# EAGLE board Q_RTC_Panel (EAGLE 7.7.0)
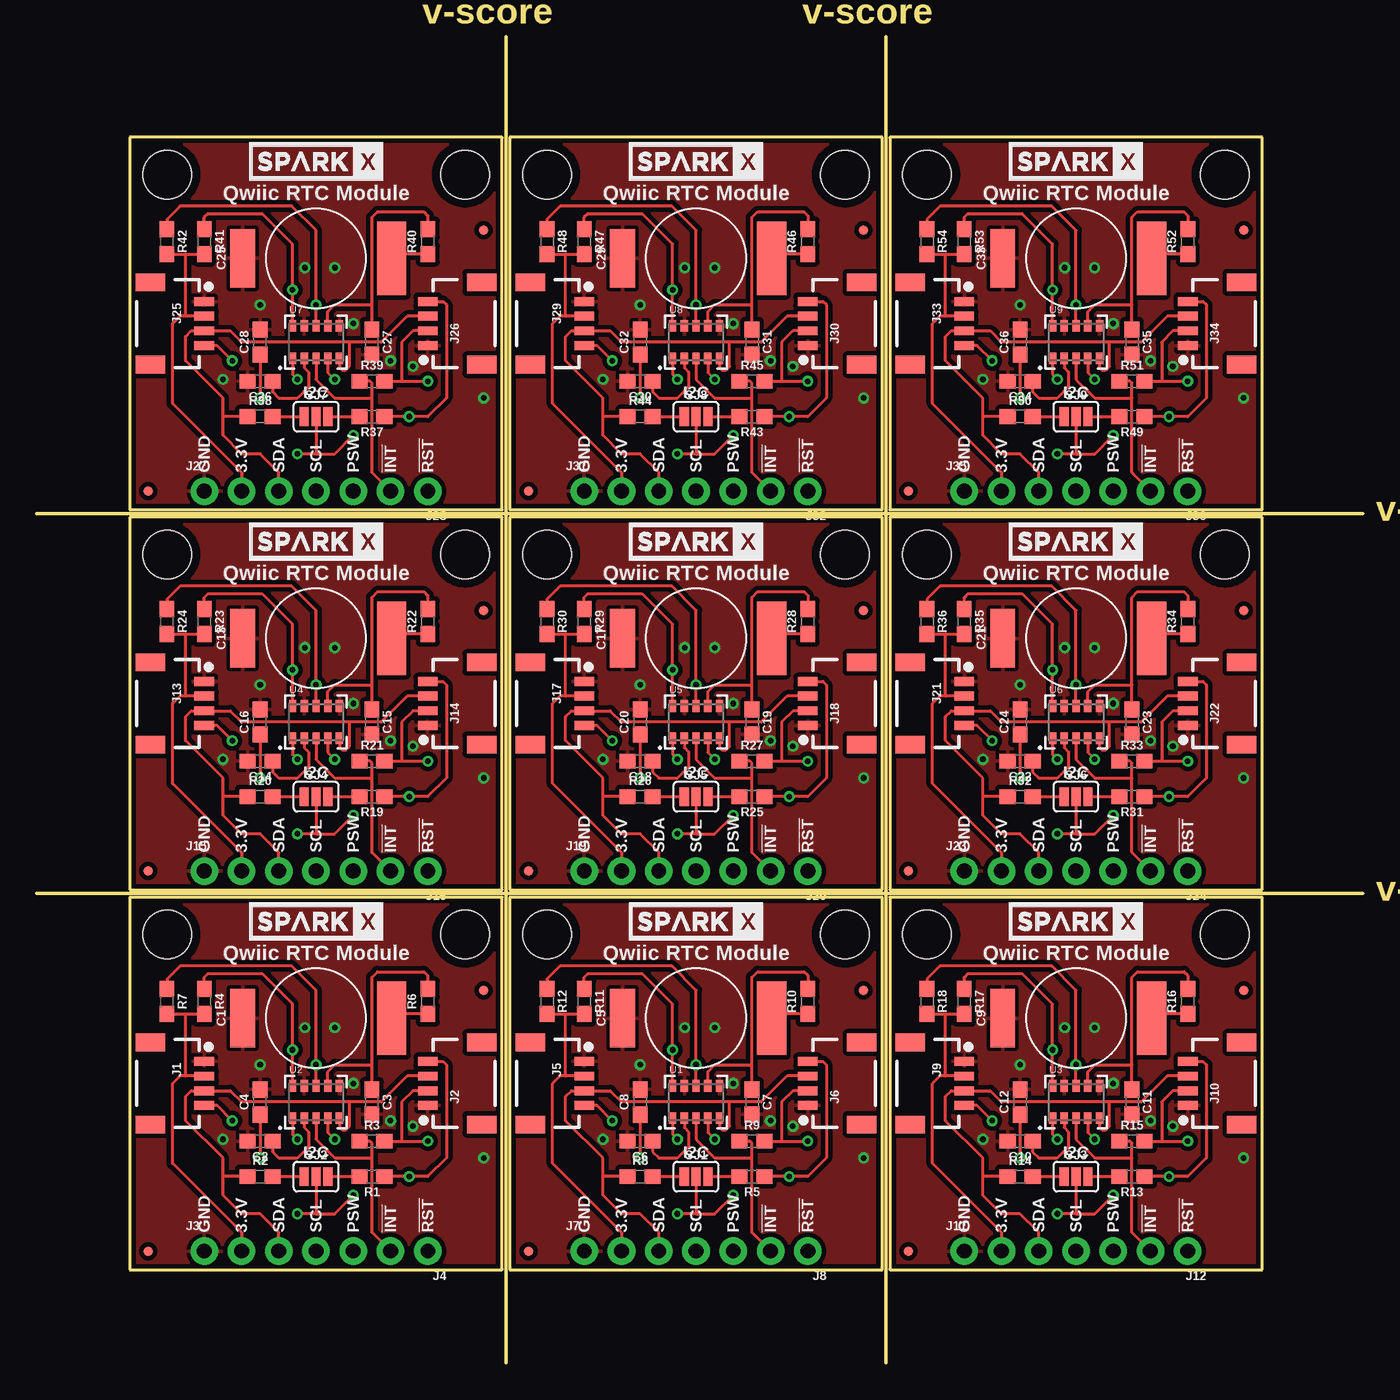
[diagram p0: board, top side]
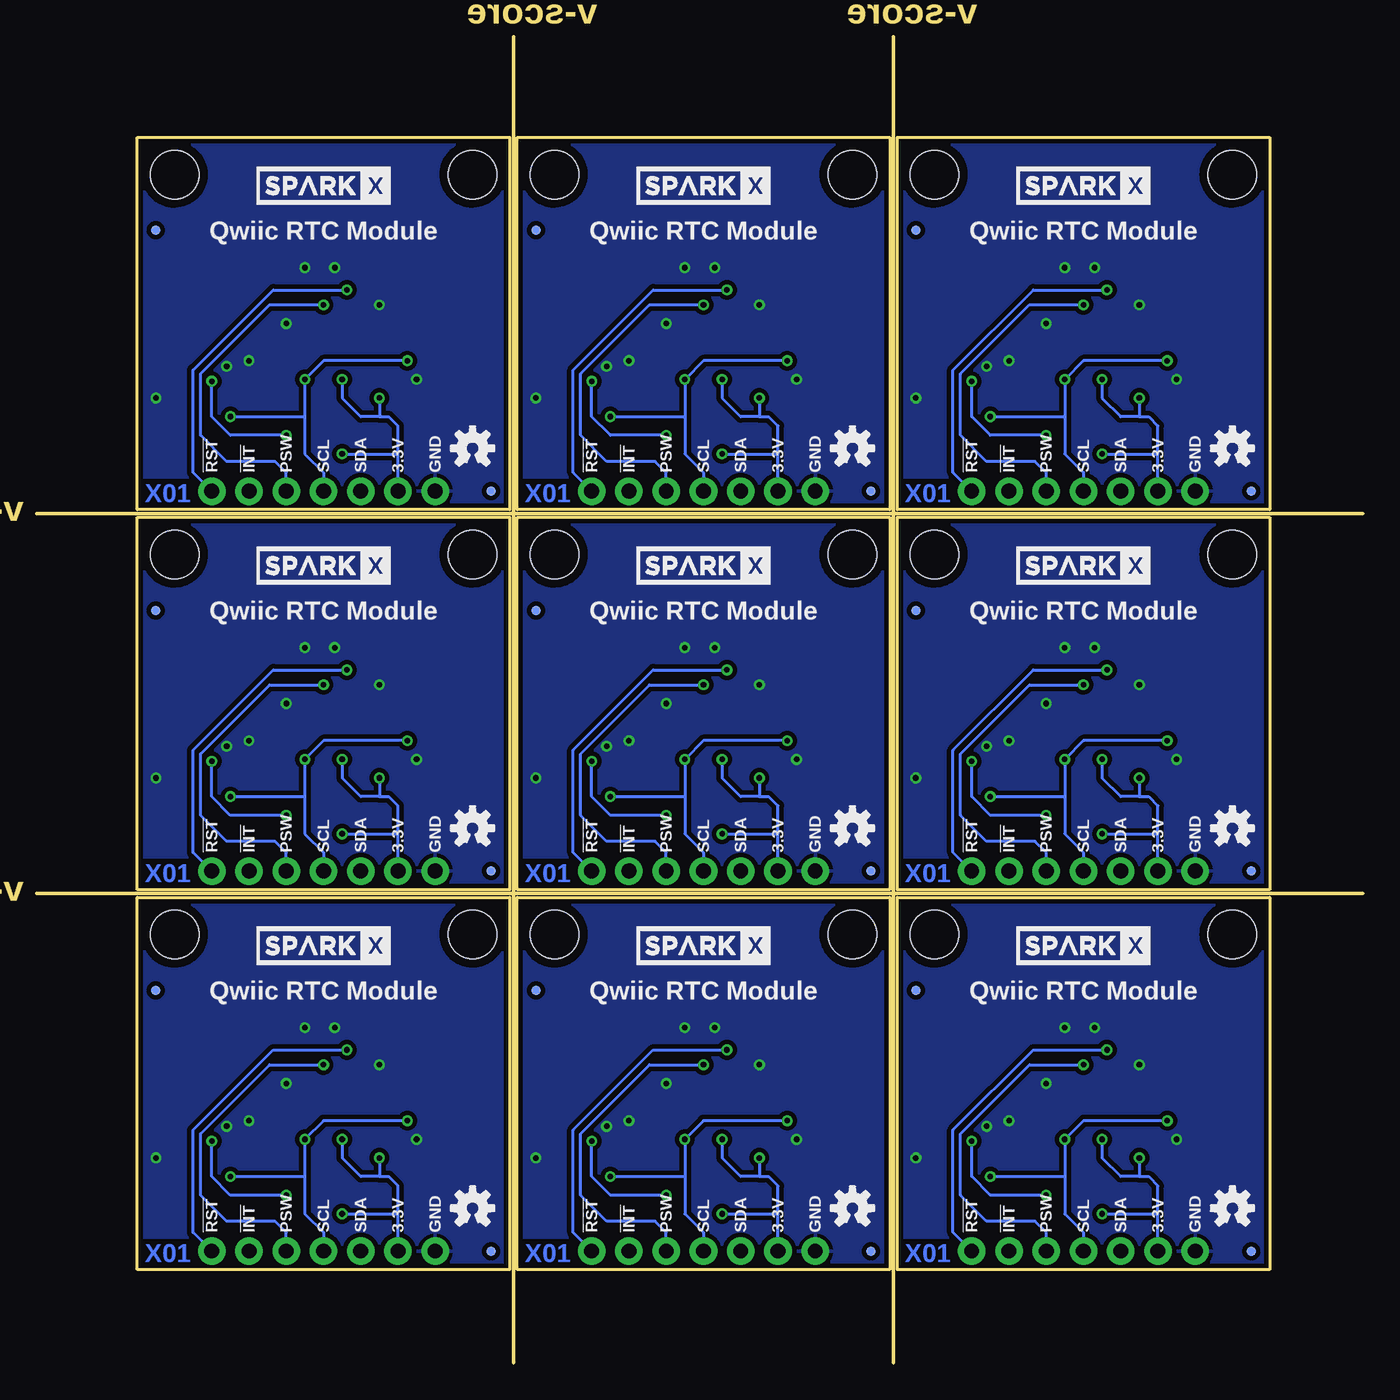
[diagram p1: board, bottom side, seen from below]

Size 90.42 x 90.42 mm. Coordinates in mm from the lower left corner, seen from the top.
Outline: 32,0 32,90.42
Outline: 57.91,0 57.91,90.42
Outline: 0,32 90.42,32
Outline: 0,57.91 90.42,57.91
Outline: 31.75,31.75 6.35,31.75 6.35,6.35 31.75,6.35 31.75,31.75
Outline: 57.66,31.75 32.26,31.75 32.26,6.35 57.66,6.35 57.66,31.75
Outline: 83.57,31.75 58.17,31.75 58.17,6.35 83.57,6.35 83.57,31.75
Outline: 31.75,57.66 6.35,57.66 6.35,32.26 31.75,32.26 31.75,57.66
Outline: 57.66,57.66 32.26,57.66 32.26,32.26 57.66,32.26 57.66,57.66
Outline: 83.57,57.66 58.17,57.66 58.17,32.26 83.57,32.26 83.57,57.66
Outline: 31.75,83.57 6.35,83.57 6.35,58.17 31.75,58.17 31.75,83.57
Outline: 57.66,83.57 32.26,83.57 32.26,58.17 57.66,58.17 57.66,83.57
Outline: 83.57,83.57 58.17,83.57 58.17,58.17 83.57,58.17 83.57,83.57
Copper layers (1*16): Top 0.035mm / dielectric 1.5mm / Bottom 0.035mm
Design rules "SparkFun-2-layer-PCBWay-LIMIT": minimum track width 6mil, minimum drill 0.3mm, track to track 6mil, track to pad 6mil, pad to pad 6mil, via to via 6mil, smd to smd 6mil, copper to edge 6mil, drill to drill 6mil, minimum pad ring 7mil, minimum via ring 7mil, stop-mask expansion 4mil, vias tented up to drill 25mil, thermal gap 10mil

## Footprints (pad centres in the part's own frame; a part is rotated, then mirrored left to right if it is on the bottom)
DSK-RADIAL-6.8MM = smd 5 x 2: + 0,5.15 | smd 4 x 1.7: - 0,-5
0603 = smd 1.1 x 1: 1 -0.85,0; 2 0.85,0
FIDUCIAL-MICRO = smd 0.635 x 0.635: 1 0,0
1X04_1MM_RA = smd 0.6 x 1.35: 1 -1.5,0; 2 -0.5,0; 3 0.5,0; 4 1.5,0 | smd 1.2 x 2: NC1 2.8,-3.675; NC2 -2.8,-3.675
1X04_NO_SILK = drill 1.016 pad 1.88: 1 0,0; 2 2.54,0; 3 5.08,0; 4 7.62,0
1X03_NO_SILK = drill 1.016 pad 1.88: 1 0,0; 2 2.54,0; 3 5.08,0
SMT-JUMPER_3_2-NC_PASTE_SILK = smd 0.635 x 1.27: 1 -0.813,0; 2 0,0; 3 0.813,0
RV-1805 = smd 0.5 x 0.8: 1 -1.6,-1.1; 2 -0.8,-1.1; 3 0,-1.1; 4 0.8,-1.1; 5 1.6,-1.1; 6 1.6,1.1; 7 0.8,1.1; 8 0,1.1; 9 -0.8,1.1; 10 -1.6,1.1 | smd 0 x 0: 11 0,0
STAND-OFF = hole 3.302: 0,0

## Placement (x,y rotation side)
C1  .22F-SUPERCAP  [DSK-RADIAL-6.8MM]  19.05,23.49 270 top
C2  47pF  [0603]  15.24,15.11 180 top
C3  10nF  [0603]  22.86,17.78 270 top
C4  10nF  [0603]  15.24,17.78 90 top
C5  .22F-SUPERCAP  [DSK-RADIAL-6.8MM]  44.96,23.49 270 top
C6  47pF  [0603]  41.15,15.11 180 top
C7  10nF  [0603]  48.77,17.78 270 top
C8  10nF  [0603]  41.15,17.78 90 top
C9  .22F-SUPERCAP  [DSK-RADIAL-6.8MM]  70.87,23.49 270 top
C10  47pF  [0603]  67.06,15.11 180 top
C11  10nF  [0603]  74.68,17.78 270 top
C12  10nF  [0603]  67.06,17.78 90 top
C13  .22F-SUPERCAP  [DSK-RADIAL-6.8MM]  19.05,49.4 270 top
C14  47pF  [0603]  15.24,41.02 180 top
C15  10nF  [0603]  22.86,43.69 270 top
C16  10nF  [0603]  15.24,43.69 90 top
C17  .22F-SUPERCAP  [DSK-RADIAL-6.8MM]  44.96,49.4 270 top
C18  47pF  [0603]  41.15,41.02 180 top
C19  10nF  [0603]  48.77,43.69 270 top
C20  10nF  [0603]  41.15,43.69 90 top
C21  .22F-SUPERCAP  [DSK-RADIAL-6.8MM]  70.87,49.4 270 top
C22  47pF  [0603]  67.06,41.02 180 top
C23  10nF  [0603]  74.68,43.69 270 top
C24  10nF  [0603]  67.06,43.69 90 top
C25  .22F-SUPERCAP  [DSK-RADIAL-6.8MM]  19.05,75.31 270 top
C26  47pF  [0603]  15.24,66.93 180 top
C27  10nF  [0603]  22.86,69.6 270 top
C28  10nF  [0603]  15.24,69.6 90 top
C29  .22F-SUPERCAP  [DSK-RADIAL-6.8MM]  44.96,75.31 270 top
C30  47pF  [0603]  41.15,66.93 180 top
C31  10nF  [0603]  48.77,69.6 270 top
C32  10nF  [0603]  41.15,69.6 90 top
C33  .22F-SUPERCAP  [DSK-RADIAL-6.8MM]  70.87,75.31 270 top
C34  47pF  [0603]  67.06,66.93 180 top
C35  10nF  [0603]  74.68,69.6 270 top
C36  10nF  [0603]  67.06,69.6 90 top
FD1  FIDUCIALUFIDUCIAL  [FIDUCIAL-MICRO]  30.48,25.4 0 bottom
FD2  FIDUCIALUFIDUCIAL  [FIDUCIAL-MICRO]  30.48,25.4 0 top
FD3  FIDUCIALUFIDUCIAL  [FIDUCIAL-MICRO]  7.62,7.62 0 bottom
FD4  FIDUCIALUFIDUCIAL  [FIDUCIAL-MICRO]  7.62,7.62 0 top
FD5  FIDUCIALUFIDUCIAL  [FIDUCIAL-MICRO]  56.39,25.4 0 bottom
FD6  FIDUCIALUFIDUCIAL  [FIDUCIAL-MICRO]  56.39,25.4 0 top
FD7  FIDUCIALUFIDUCIAL  [FIDUCIAL-MICRO]  33.53,7.62 0 bottom
FD8  FIDUCIALUFIDUCIAL  [FIDUCIAL-MICRO]  33.53,7.62 0 top
FD9  FIDUCIALUFIDUCIAL  [FIDUCIAL-MICRO]  82.3,25.4 0 bottom
FD10  FIDUCIALUFIDUCIAL  [FIDUCIAL-MICRO]  82.3,25.4 0 top
FD11  FIDUCIALUFIDUCIAL  [FIDUCIAL-MICRO]  59.44,7.62 0 bottom
FD12  FIDUCIALUFIDUCIAL  [FIDUCIAL-MICRO]  59.44,7.62 0 top
FD13  FIDUCIALUFIDUCIAL  [FIDUCIAL-MICRO]  30.48,51.31 0 bottom
FD14  FIDUCIALUFIDUCIAL  [FIDUCIAL-MICRO]  30.48,51.31 0 top
FD15  FIDUCIALUFIDUCIAL  [FIDUCIAL-MICRO]  7.62,33.53 0 bottom
FD16  FIDUCIALUFIDUCIAL  [FIDUCIAL-MICRO]  7.62,33.53 0 top
FD17  FIDUCIALUFIDUCIAL  [FIDUCIAL-MICRO]  56.39,51.31 0 bottom
FD18  FIDUCIALUFIDUCIAL  [FIDUCIAL-MICRO]  56.39,51.31 0 top
FD19  FIDUCIALUFIDUCIAL  [FIDUCIAL-MICRO]  33.53,33.53 0 bottom
FD20  FIDUCIALUFIDUCIAL  [FIDUCIAL-MICRO]  33.53,33.53 0 top
FD21  FIDUCIALUFIDUCIAL  [FIDUCIAL-MICRO]  82.3,51.31 0 bottom
FD22  FIDUCIALUFIDUCIAL  [FIDUCIAL-MICRO]  82.3,51.31 0 top
FD23  FIDUCIALUFIDUCIAL  [FIDUCIAL-MICRO]  59.44,33.53 0 bottom
FD24  FIDUCIALUFIDUCIAL  [FIDUCIAL-MICRO]  59.44,33.53 0 top
FD25  FIDUCIALUFIDUCIAL  [FIDUCIAL-MICRO]  30.48,77.22 0 bottom
FD26  FIDUCIALUFIDUCIAL  [FIDUCIAL-MICRO]  30.48,77.22 0 top
FD27  FIDUCIALUFIDUCIAL  [FIDUCIAL-MICRO]  7.62,59.44 0 bottom
FD28  FIDUCIALUFIDUCIAL  [FIDUCIAL-MICRO]  7.62,59.44 0 top
FD29  FIDUCIALUFIDUCIAL  [FIDUCIAL-MICRO]  56.39,77.22 0 bottom
FD30  FIDUCIALUFIDUCIAL  [FIDUCIAL-MICRO]  56.39,77.22 0 top
FD31  FIDUCIALUFIDUCIAL  [FIDUCIAL-MICRO]  33.53,59.44 0 bottom
FD32  FIDUCIALUFIDUCIAL  [FIDUCIAL-MICRO]  33.53,59.44 0 top
FD33  FIDUCIALUFIDUCIAL  [FIDUCIAL-MICRO]  82.3,77.22 0 bottom
FD34  FIDUCIALUFIDUCIAL  [FIDUCIAL-MICRO]  82.3,77.22 0 top
FD35  FIDUCIALUFIDUCIAL  [FIDUCIAL-MICRO]  59.44,59.44 0 bottom
FD36  FIDUCIALUFIDUCIAL  [FIDUCIAL-MICRO]  59.44,59.44 0 top
J1  SMD  [1X04_1MM_RA]  11.43,19.05 270 top
J2  SMD  [1X04_1MM_RA]  26.67,19.05 90 top
J3  PTH  [1X04_NO_SILK]  11.43,7.62 0 top
J4  [1X03_NO_SILK]  26.67,7.62 180 top
J5  SMD  [1X04_1MM_RA]  37.34,19.05 270 top
J6  SMD  [1X04_1MM_RA]  52.58,19.05 90 top
J7  PTH  [1X04_NO_SILK]  37.34,7.62 0 top
J8  [1X03_NO_SILK]  52.58,7.62 180 top
J9  SMD  [1X04_1MM_RA]  63.25,19.05 270 top
J10  SMD  [1X04_1MM_RA]  78.49,19.05 90 top
J11  PTH  [1X04_NO_SILK]  63.25,7.62 0 top
J12  [1X03_NO_SILK]  78.49,7.62 180 top
J13  SMD  [1X04_1MM_RA]  11.43,44.96 270 top
J14  SMD  [1X04_1MM_RA]  26.67,44.96 90 top
J15  PTH  [1X04_NO_SILK]  11.43,33.53 0 top
J16  [1X03_NO_SILK]  26.67,33.53 180 top
J17  SMD  [1X04_1MM_RA]  37.34,44.96 270 top
J18  SMD  [1X04_1MM_RA]  52.58,44.96 90 top
J19  PTH  [1X04_NO_SILK]  37.34,33.53 0 top
J20  [1X03_NO_SILK]  52.58,33.53 180 top
J21  SMD  [1X04_1MM_RA]  63.25,44.96 270 top
J22  SMD  [1X04_1MM_RA]  78.49,44.96 90 top
J23  PTH  [1X04_NO_SILK]  63.25,33.53 0 top
J24  [1X03_NO_SILK]  78.49,33.53 180 top
J25  SMD  [1X04_1MM_RA]  11.43,70.87 270 top
J26  SMD  [1X04_1MM_RA]  26.67,70.87 90 top
J27  PTH  [1X04_NO_SILK]  11.43,59.44 0 top
J28  [1X03_NO_SILK]  26.67,59.44 180 top
J29  SMD  [1X04_1MM_RA]  37.34,70.87 270 top
J30  SMD  [1X04_1MM_RA]  52.58,70.87 90 top
J31  PTH  [1X04_NO_SILK]  37.34,59.44 0 top
J32  [1X03_NO_SILK]  52.58,59.44 180 top
J33  SMD  [1X04_1MM_RA]  63.25,70.87 270 top
J34  SMD  [1X04_1MM_RA]  78.49,70.87 90 top
J35  PTH  [1X04_NO_SILK]  63.25,59.44 0 top
J36  [1X03_NO_SILK]  78.49,59.44 180 top
LOGO1  OSHW-LOGOS  [OSHW-LOGO-S]  8.89,10.54 0 bottom
LOGO2  OSHW-LOGOS  [OSHW-LOGO-S]  34.8,10.54 0 bottom
LOGO3  OSHW-LOGOS  [OSHW-LOGO-S]  60.71,10.54 0 bottom
LOGO4  OSHW-LOGOS  [OSHW-LOGO-S]  8.89,36.45 0 bottom
LOGO5  OSHW-LOGOS  [OSHW-LOGO-S]  34.8,36.45 0 bottom
LOGO6  OSHW-LOGOS  [OSHW-LOGO-S]  60.71,36.45 0 bottom
LOGO7  OSHW-LOGOS  [OSHW-LOGO-S]  8.89,62.36 0 bottom
LOGO8  OSHW-LOGOS  [OSHW-LOGO-S]  34.8,62.36 0 bottom
LOGO9  OSHW-LOGOS  [OSHW-LOGO-S]  60.71,62.36 0 bottom
R1  2.2k  [0603]  22.86,12.7 180 top
R2  2.2k  [0603]  15.24,12.7 0 top
R3  10k  [0603]  22.86,15.11 0 top
R4  10k  [0603]  11.43,24.64 270 top
R5  2.2k  [0603]  48.77,12.7 180 top
R6  1K  [0603]  26.67,24.64 90 top
R7  10k  [0603]  8.89,24.64 270 top
R8  2.2k  [0603]  41.15,12.7 0 top
R9  10k  [0603]  48.77,15.11 0 top
R10  1K  [0603]  52.58,24.64 90 top
R11  10k  [0603]  37.34,24.64 270 top
R12  10k  [0603]  34.8,24.64 270 top
R13  2.2k  [0603]  74.68,12.7 180 top
R14  2.2k  [0603]  67.06,12.7 0 top
R15  10k  [0603]  74.68,15.11 0 top
R16  1K  [0603]  78.49,24.64 90 top
R17  10k  [0603]  63.25,24.64 270 top
R18  10k  [0603]  60.71,24.64 270 top
R19  2.2k  [0603]  22.86,38.61 180 top
R20  2.2k  [0603]  15.24,38.61 0 top
R21  10k  [0603]  22.86,41.02 0 top
R22  1K  [0603]  26.67,50.55 90 top
R23  10k  [0603]  11.43,50.55 270 top
R24  10k  [0603]  8.89,50.55 270 top
R25  2.2k  [0603]  48.77,38.61 180 top
R26  2.2k  [0603]  41.15,38.61 0 top
R27  10k  [0603]  48.77,41.02 0 top
R28  1K  [0603]  52.58,50.55 90 top
R29  10k  [0603]  37.34,50.55 270 top
R30  10k  [0603]  34.8,50.55 270 top
R31  2.2k  [0603]  74.68,38.61 180 top
R32  2.2k  [0603]  67.06,38.61 0 top
R33  10k  [0603]  74.68,41.02 0 top
R34  1K  [0603]  78.49,50.55 90 top
R35  10k  [0603]  63.25,50.55 270 top
R36  10k  [0603]  60.71,50.55 270 top
R37  2.2k  [0603]  22.86,64.52 180 top
R38  2.2k  [0603]  15.24,64.52 0 top
R39  10k  [0603]  22.86,66.93 0 top
R40  1K  [0603]  26.67,76.45 90 top
R41  10k  [0603]  11.43,76.45 270 top
R42  10k  [0603]  8.89,76.45 270 top
R43  2.2k  [0603]  48.77,64.52 180 top
R44  2.2k  [0603]  41.15,64.52 0 top
R45  10k  [0603]  48.77,66.93 0 top
R46  1K  [0603]  52.58,76.45 90 top
R47  10k  [0603]  37.34,76.45 270 top
R48  10k  [0603]  34.8,76.45 270 top
R49  2.2k  [0603]  74.68,64.52 180 top
R50  2.2k  [0603]  67.06,64.52 0 top
R51  10k  [0603]  74.68,66.93 0 top
R52  1K  [0603]  78.49,76.45 90 top
R53  10k  [0603]  63.25,76.45 270 top
R54  10k  [0603]  60.71,76.45 270 top
SJ1  JUMPER-SMT_3_2-NC_PASTE_SILK  [SMT-JUMPER_3_2-NC_PASTE_SILK]  44.96,12.7 0 top
SJ2  JUMPER-SMT_3_2-NC_PASTE_SILK  [SMT-JUMPER_3_2-NC_PASTE_SILK]  19.05,12.7 0 top
SJ3  JUMPER-SMT_3_2-NC_PASTE_SILK  [SMT-JUMPER_3_2-NC_PASTE_SILK]  70.87,12.7 0 top
SJ4  JUMPER-SMT_3_2-NC_PASTE_SILK  [SMT-JUMPER_3_2-NC_PASTE_SILK]  19.05,38.61 0 top
SJ5  JUMPER-SMT_3_2-NC_PASTE_SILK  [SMT-JUMPER_3_2-NC_PASTE_SILK]  44.96,38.61 0 top
SJ6  JUMPER-SMT_3_2-NC_PASTE_SILK  [SMT-JUMPER_3_2-NC_PASTE_SILK]  70.87,38.61 0 top
SJ7  JUMPER-SMT_3_2-NC_PASTE_SILK  [SMT-JUMPER_3_2-NC_PASTE_SILK]  19.05,64.52 0 top
SJ8  JUMPER-SMT_3_2-NC_PASTE_SILK  [SMT-JUMPER_3_2-NC_PASTE_SILK]  44.96,64.52 0 top
SJ9  JUMPER-SMT_3_2-NC_PASTE_SILK  [SMT-JUMPER_3_2-NC_PASTE_SILK]  70.87,64.52 0 top
U1  RV-1805  [RV-1805]  44.96,17.78 0 top
U2  RV-1805  [RV-1805]  19.05,17.78 0 top
U3  RV-1805  [RV-1805]  70.87,17.78 0 top
U4  RV-1805  [RV-1805]  19.05,43.69 0 top
U5  RV-1805  [RV-1805]  44.96,43.69 0 top
U6  RV-1805  [RV-1805]  70.87,43.69 0 top
U7  RV-1805  [RV-1805]  19.05,69.6 0 top
U8  RV-1805  [RV-1805]  44.96,69.6 0 top
U9  RV-1805  [RV-1805]  70.87,69.6 0 top
U$1  STAND-OFF  [STAND-OFF]  55.12,29.21 180 top
U$2  STAND-OFF  [STAND-OFF]  34.8,29.21 180 top
U$3  SPARKX-LOGO4  [SPARKX-MEDIUM]  19.05,28.45 0 bottom
U$4  SPARKX-LOGO4  [SPARKX-MEDIUM]  44.96,28.45 0 bottom
U$5  SPARKX-LOGO4  [SPARKX-MEDIUM]  19.05,30.1 0 top
U$6  STAND-OFF  [STAND-OFF]  29.21,29.21 180 top
U$7  STAND-OFF  [STAND-OFF]  8.89,29.21 180 top
U$8  SPARKX-LOGO4  [SPARKX-MEDIUM]  44.96,30.1 0 top
U$9  STAND-OFF  [STAND-OFF]  81.03,29.21 180 top
U$10  STAND-OFF  [STAND-OFF]  60.71,29.21 180 top
U$11  SPARKX-LOGO4  [SPARKX-MEDIUM]  70.87,28.45 0 bottom
U$12  SPARKX-LOGO4  [SPARKX-MEDIUM]  70.87,30.1 0 top
U$13  STAND-OFF  [STAND-OFF]  29.21,55.12 180 top
U$14  STAND-OFF  [STAND-OFF]  8.89,55.12 180 top
U$15  SPARKX-LOGO4  [SPARKX-MEDIUM]  19.05,54.36 0 bottom
U$16  SPARKX-LOGO4  [SPARKX-MEDIUM]  19.05,56.01 0 top
U$17  STAND-OFF  [STAND-OFF]  55.12,55.12 180 top
U$18  STAND-OFF  [STAND-OFF]  34.8,55.12 180 top
U$19  SPARKX-LOGO4  [SPARKX-MEDIUM]  44.96,54.36 0 bottom
U$20  SPARKX-LOGO4  [SPARKX-MEDIUM]  44.96,56.01 0 top
U$21  STAND-OFF  [STAND-OFF]  81.03,55.12 180 top
U$22  STAND-OFF  [STAND-OFF]  60.71,55.12 180 top
U$23  SPARKX-LOGO4  [SPARKX-MEDIUM]  70.87,54.36 0 bottom
U$24  SPARKX-LOGO4  [SPARKX-MEDIUM]  70.87,56.01 0 top
U$25  STAND-OFF  [STAND-OFF]  29.21,81.03 180 top
U$26  STAND-OFF  [STAND-OFF]  8.89,81.03 180 top
U$27  SPARKX-LOGO4  [SPARKX-MEDIUM]  19.05,80.26 0 bottom
U$28  SPARKX-LOGO4  [SPARKX-MEDIUM]  19.05,81.91 0 top
U$29  STAND-OFF  [STAND-OFF]  55.12,81.03 180 top
U$30  STAND-OFF  [STAND-OFF]  34.8,81.03 180 top
U$31  SPARKX-LOGO4  [SPARKX-MEDIUM]  44.96,80.26 0 bottom
U$32  SPARKX-LOGO4  [SPARKX-MEDIUM]  44.96,81.91 0 top
U$33  STAND-OFF  [STAND-OFF]  81.03,81.03 180 top
U$34  STAND-OFF  [STAND-OFF]  60.71,81.03 180 top
U$35  SPARKX-LOGO4  [SPARKX-MEDIUM]  70.87,80.26 0 bottom
U$36  SPARKX-LOGO4  [SPARKX-MEDIUM]  70.87,81.91 0 top

## Library data of the parts
C1 C5 C9 C13 C17 C21 C25 C29 C33 = SparkFun-Capacitors; PROD_ID: CAP-13907
C2 C6 C10 C14 C18 C22 C26 C30 C34 = SparkFun-Capacitors; PROD_ID: CAP-08913
C3 C4 C7 C8 C11 C12 C15 C16 C19 C20 C23 C24 C27 C28 C31 C32 C35 C36 = SparkFun-Capacitors; PROD_ID: CAP-00867
FD1-FD36 LOGO1-LOGO9 = SparkFun-Aesthetics
J1 J2 J5 J6 J9 J10 J13 J14 J17 J18 J21 J22 J25 J26 J29 J30 J33 J34 = SparkFun-Connectors; PROD_ID: CONN-13694
J3 J7 J11 J15 J19 J23 J27 J31 J35 = SparkFun-Connectors; PROD_ID: CONN-09696
J4 J8 J12 J16 J20 J24 J28 J32 J36 = SparkFun-Connectors
R1 R2 R5 R8 R13 R14 R19 R20 R25 R26 R31 R32 R37 R38 R43 R44 R49 R50 = SparkFun-Resistors; PROD_ID: RES-08272
R3 R4 R7 R9 R11 R12 R15 R17 R18 R21 R23 R24 R27 R29 R30 R33 R35 R36 R39 R41 R42 R45 R47 R48 R51 R53 R54 = SparkFun-Resistors; PROD_ID: RES-00824
R6 R10 R16 R22 R28 R34 R40 R46 R52 = SparkFun-Resistors; PROD_ID: RES-11227
SJ1-SJ9 = SparkFun-Jumpers
U1-U9 = SparkFun-Clocks
U$1 U$2 U$6 U$7 U$9 U$10 U$13 U$14 U$17 U$18 U$21 U$22 U$25 U$26 U$29 U$30 U$33 U$34 = SparkFun
U$3-U$5 U$8 U$11 U$12 U$15 U$16 U$19 U$20 U$23 U$24 U$27 U$28 U$31 U$32 U$35 U$36 = SparkX

## Nets
3.3V: C4.1 J1.2 J2.2 J3.2 R3.2 R4.2 R7.2 SJ2.2 U2.1
3.3V1: C8.1 J5.2 J6.2 J7.2 R9.2 R11.2 R12.2 SJ1.2 U1.1
3.3V2: C12.1 J9.2 J10.2 J11.2 R15.2 R17.2 R18.2 SJ3.2 U3.1
3.3V3: C16.1 J13.2 J14.2 J15.2 R21.2 R23.2 R24.2 SJ4.2 U4.1
3.3V4: C20.1 J17.2 J18.2 J19.2 R27.2 R29.2 R30.2 SJ5.2 U5.1
3.3V5: C24.1 J21.2 J22.2 J23.2 R33.2 R35.2 R36.2 SJ6.2 U6.1
3.3V6: C28.1 J25.2 J26.2 J27.2 R39.2 R41.2 R42.2 SJ7.2 U7.1
3.3V7: C32.1 J29.2 J30.2 J31.2 R45.2 R47.2 R48.2 SJ8.2 U8.1
3.3V8: C36.1 J33.2 J34.2 J35.2 R51.2 R53.2 R54.2 SJ9.2 U9.1
!INT: J4.2 R3.1 U2.3
!INT1: J8.2 R9.1 U1.3
!INT2: J12.2 R15.1 U3.3
!INT3: J16.2 R21.1 U4.3
!INT4: J20.2 R27.1 U5.3
!INT5: J24.2 R33.1 U6.3
!INT6: J28.2 R39.1 U7.3
!INT7: J32.2 R45.1 U8.3
!INT8: J36.2 R51.1 U9.3
!RST: J4.1 R4.1 U2.10
!RST1: J8.1 R11.1 U1.10
!RST2: J12.1 R17.1 U3.10
!RST3: J16.1 R23.1 U4.10
!RST4: J20.1 R29.1 U5.10
!RST5: J24.1 R35.1 U6.10
!RST6: J28.1 R41.1 U7.10
!RST7: J32.1 R47.1 U8.10
!RST8: J36.1 R53.1 U9.10
GND: C1.- C2.2 C3.2 C4.2 J1.1 J2.1 J3.1 U2.6 U2.9
GND1: C5.- C6.2 C7.2 C8.2 J5.1 J6.1 J7.1 U1.6 U1.9
GND2: C9.- C10.2 C11.2 C12.2 J9.1 J10.1 J11.1 U3.6 U3.9
GND3: C13.- C14.2 C15.2 C16.2 J13.1 J14.1 J15.1 U4.6 U4.9
GND4: C17.- C18.2 C19.2 C20.2 J17.1 J18.1 J19.1 U5.6 U5.9
GND5: C21.- C22.2 C23.2 C24.2 J21.1 J22.1 J23.1 U6.6 U6.9
GND6: C25.- C26.2 C27.2 C28.2 J25.1 J26.1 J27.1 U7.6 U7.9
GND7: C29.- C30.2 C31.2 C32.2 J29.1 J30.1 J31.1 U8.6 U8.9
GND8: C33.- C34.2 C35.2 C36.2 J33.1 J34.1 J35.1 U9.6 U9.9
N$1: R1.2 SJ2.3
N$2: R2.2 SJ2.1
N$3: R5.2 SJ1.3
N$4: C2.1 U2.2
N$5: C1.+ R6.1
N$6: R8.2 SJ1.1
N$7: C6.1 U1.2
N$8: C5.+ R10.1
N$9: R13.2 SJ3.3
N$10: R14.2 SJ3.1
N$11: C10.1 U3.2
N$12: C9.+ R16.1
N$13: R19.2 SJ4.3
N$14: R20.2 SJ4.1
N$15: C14.1 U4.2
N$16: C13.+ R22.1
N$17: R25.2 SJ5.3
N$18: R26.2 SJ5.1
N$19: C18.1 U5.2
N$20: C17.+ R28.1
N$21: R31.2 SJ6.3
N$22: R32.2 SJ6.1
N$23: C22.1 U6.2
N$24: C21.+ R34.1
N$25: R37.2 SJ7.3
N$26: R38.2 SJ7.1
N$27: C26.1 U7.2
N$28: C25.+ R40.1
N$29: R43.2 SJ8.3
N$30: R44.2 SJ8.1
N$31: C30.1 U8.2
N$32: C29.+ R46.1
N$33: R49.2 SJ9.3
N$34: R50.2 SJ9.1
N$35: C34.1 U9.2
N$36: C33.+ R52.1
PSW: J4.3 R7.1 U2.8
PSW1: J8.3 R12.1 U1.8
PSW2: J12.3 R18.1 U3.8
PSW3: J16.3 R24.1 U4.8
PSW4: J20.3 R30.1 U5.8
PSW5: J24.3 R36.1 U6.8
PSW6: J28.3 R42.1 U7.8
PSW7: J32.3 R48.1 U8.8
PSW8: J36.3 R54.1 U9.8
SCL: J1.4 J2.4 J3.4 R1.1 U2.4
SCL1: J5.4 J6.4 J7.4 R5.1 U1.4
SCL2: J9.4 J10.4 J11.4 R13.1 U3.4
SCL3: J13.4 J14.4 J15.4 R19.1 U4.4
SCL4: J17.4 J18.4 J19.4 R25.1 U5.4
SCL5: J21.4 J22.4 J23.4 R31.1 U6.4
SCL6: J25.4 J26.4 J27.4 R37.1 U7.4
SCL7: J29.4 J30.4 J31.4 R43.1 U8.4
SCL8: J33.4 J34.4 J35.4 R49.1 U9.4
SDA: J1.3 J2.3 J3.3 R2.1 U2.5
SDA1: J5.3 J6.3 J7.3 R8.1 U1.5
SDA2: J9.3 J10.3 J11.3 R14.1 U3.5
SDA3: J13.3 J14.3 J15.3 R20.1 U4.5
SDA4: J17.3 J18.3 J19.3 R26.1 U5.5
SDA5: J21.3 J22.3 J23.3 R32.1 U6.5
SDA6: J25.3 J26.3 J27.3 R38.1 U7.5
SDA7: J29.3 J30.3 J31.3 R44.1 U8.5
SDA8: J33.3 J34.3 J35.3 R50.1 U9.5
VBACKUP: C3.1 R6.2 U2.7
VBACKUP1: C7.1 R10.2 U1.7
VBACKUP2: C11.1 R16.2 U3.7
VBACKUP3: C15.1 R22.2 U4.7
VBACKUP4: C19.1 R28.2 U5.7
VBACKUP5: C23.1 R34.2 U6.7
VBACKUP6: C27.1 R40.2 U7.7
VBACKUP7: C31.1 R46.2 U8.7
VBACKUP8: C35.1 R52.2 U9.7

## Tracks (layer width: path | path; a pad name or v marks a point on that pad's centre or on a via)
3.3V  (via drill 0.38)
  Top 0.203: U2.1 17.45,15.57 v17.78,15.24 | J2.2 25.66,18.55 24.89,17.78 24.89,15.11 | R7.2 10.16,23.79 | 10.16,23.79 R4.2 | J1.2 10.16,19.55 | 10.16,19.55 9.77,19.55 9.27,19.05 9.27,13.59 13.97,8.89 J3.2 | 10.16,19.55 10.16,23.79 | SJ2.2 19.05,10.16 | R3.2 24.89,15.11 | 24.89,15.11 v26.67,15.11 | C4.1 v15.24,13.97 | 19.05,10.16 v17.78,10.16 | 19.05,10.16 20.32,10.16 v21.59,11.43
  Bottom 0.203: J3.2 13.97,10.16 | 13.97,10.16 13.97,12.06 14.61,12.7 15.24,12.7 | 15.24,12.7 16.51,12.7 17.78,13.97 v17.78,15.24 | v17.78,10.16 13.97,10.16 | v21.59,11.43 25.4,11.43 26.67,12.7 v26.67,15.11 | v15.24,13.97 15.24,12.7
3.3V1  (via drill 0.38)
  Top 0.203: U1.1 43.36,15.57 v43.69,15.24 | J6.2 51.57,18.55 50.8,17.78 50.8,15.11 | R12.2 36.07,23.79 | 36.07,23.79 R11.2 | J5.2 36.07,19.55 | 36.07,19.55 35.68,19.55 35.18,19.05 35.18,13.59 39.88,8.89 J7.2 | 36.07,19.55 36.07,23.79 | SJ1.2 44.96,10.16 | R9.2 50.8,15.11 | 50.8,15.11 v52.58,15.11 | C8.1 v41.15,13.97 | 44.96,10.16 v43.69,10.16 | 44.96,10.16 46.23,10.16 v47.5,11.43
  Bottom 0.203: J7.2 39.88,10.16 | 39.88,10.16 39.88,12.06 40.51,12.7 41.15,12.7 | 41.15,12.7 42.42,12.7 43.69,13.97 v43.69,15.24 | v43.69,10.16 39.88,10.16 | v47.5,11.43 51.31,11.43 52.58,12.7 v52.58,15.11 | v41.15,13.97 41.15,12.7
3.3V2  (via drill 0.38)
  Top 0.203: U3.1 69.27,15.57 v69.6,15.24 | J10.2 77.48,18.55 76.71,17.78 76.71,15.11 | R18.2 61.98,23.79 | 61.98,23.79 R17.2 | J9.2 61.98,19.55 | 61.98,19.55 61.59,19.55 61.09,19.05 61.09,13.59 65.79,8.89 J11.2 | 61.98,19.55 61.98,23.79 | SJ3.2 70.87,10.16 | R15.2 76.71,15.11 | 76.71,15.11 v78.49,15.11 | C12.1 v67.06,13.97 | 70.87,10.16 v69.6,10.16 | 70.87,10.16 72.14,10.16 v73.41,11.43
  Bottom 0.203: J11.2 65.79,10.16 | 65.79,10.16 65.79,12.06 66.42,12.7 67.06,12.7 | 67.06,12.7 68.33,12.7 69.6,13.97 v69.6,15.24 | v69.6,10.16 65.79,10.16 | v73.41,11.43 77.22,11.43 78.49,12.7 v78.49,15.11 | v67.06,13.97 67.06,12.7
3.3V3  (via drill 0.38)
  Top 0.203: U4.1 17.45,41.48 v17.78,41.15 | J14.2 25.66,44.46 24.89,43.69 24.89,41.02 | R24.2 10.16,49.7 | 10.16,49.7 R23.2 | J13.2 10.16,45.46 | 10.16,45.46 9.77,45.46 9.27,44.96 9.27,39.5 13.97,34.8 J15.2 | 10.16,45.46 10.16,49.7 | SJ4.2 19.05,36.07 | R21.2 24.89,41.02 | 24.89,41.02 v26.67,41.02 | C16.1 v15.24,39.88 | 19.05,36.07 v17.78,36.07 | 19.05,36.07 20.32,36.07 v21.59,37.34
  Bottom 0.203: J15.2 13.97,36.07 | 13.97,36.07 13.97,37.97 14.61,38.61 15.24,38.61 | 15.24,38.61 16.51,38.61 17.78,39.88 v17.78,41.15 | v17.78,36.07 13.97,36.07 | v21.59,37.34 25.4,37.34 26.67,38.61 v26.67,41.02 | v15.24,39.88 15.24,38.61
3.3V4  (via drill 0.38)
  Top 0.203: U5.1 43.36,41.48 v43.69,41.15 | J18.2 51.57,44.46 50.8,43.69 50.8,41.02 | R30.2 36.07,49.7 | 36.07,49.7 R29.2 | J17.2 36.07,45.46 | 36.07,45.46 35.68,45.46 35.18,44.96 35.18,39.5 39.88,34.8 J19.2 | 36.07,45.46 36.07,49.7 | SJ5.2 44.96,36.07 | R27.2 50.8,41.02 | 50.8,41.02 v52.58,41.02 | C20.1 v41.15,39.88 | 44.96,36.07 v43.69,36.07 | 44.96,36.07 46.23,36.07 v47.5,37.34
  Bottom 0.203: J19.2 39.88,36.07 | 39.88,36.07 39.88,37.97 40.51,38.61 41.15,38.61 | 41.15,38.61 42.42,38.61 43.69,39.88 v43.69,41.15 | v43.69,36.07 39.88,36.07 | v47.5,37.34 51.31,37.34 52.58,38.61 v52.58,41.02 | v41.15,39.88 41.15,38.61
3.3V5  (via drill 0.38)
  Top 0.203: U6.1 69.27,41.48 v69.6,41.15 | J22.2 77.48,44.46 76.71,43.69 76.71,41.02 | R36.2 61.98,49.7 | 61.98,49.7 R35.2 | J21.2 61.98,45.46 | 61.98,45.46 61.59,45.46 61.09,44.96 61.09,39.5 65.79,34.8 J23.2 | 61.98,45.46 61.98,49.7 | SJ6.2 70.87,36.07 | R33.2 76.71,41.02 | 76.71,41.02 v78.49,41.02 | C24.1 v67.06,39.88 | 70.87,36.07 v69.6,36.07 | 70.87,36.07 72.14,36.07 v73.41,37.34
  Bottom 0.203: J23.2 65.79,36.07 | 65.79,36.07 65.79,37.97 66.42,38.61 67.06,38.61 | 67.06,38.61 68.33,38.61 69.6,39.88 v69.6,41.15 | v69.6,36.07 65.79,36.07 | v73.41,37.34 77.22,37.34 78.49,38.61 v78.49,41.02 | v67.06,39.88 67.06,38.61
3.3V6  (via drill 0.38)
  Top 0.203: U7.1 17.45,67.39 v17.78,67.06 | J26.2 25.66,70.37 24.89,69.6 24.89,66.93 | R42.2 10.16,75.6 | 10.16,75.6 R41.2 | J25.2 10.16,71.37 | 10.16,71.37 9.77,71.37 9.27,70.87 9.27,65.41 13.97,60.71 J27.2 | 10.16,71.37 10.16,75.6 | SJ7.2 19.05,61.98 | R39.2 24.89,66.93 | 24.89,66.93 v26.67,66.93 | C28.1 v15.24,65.79 | 19.05,61.98 v17.78,61.98 | 19.05,61.98 20.32,61.98 v21.59,63.25
  Bottom 0.203: J27.2 13.97,61.98 | 13.97,61.98 13.97,63.88 14.61,64.52 15.24,64.52 | 15.24,64.52 16.51,64.52 17.78,65.79 v17.78,67.06 | v17.78,61.98 13.97,61.98 | v21.59,63.25 25.4,63.25 26.67,64.52 v26.67,66.93 | v15.24,65.79 15.24,64.52
3.3V7  (via drill 0.38)
  Top 0.203: U8.1 43.36,67.39 v43.69,67.06 | J30.2 51.57,70.37 50.8,69.6 50.8,66.93 | R48.2 36.07,75.6 | 36.07,75.6 R47.2 | J29.2 36.07,71.37 | 36.07,71.37 35.68,71.37 35.18,70.87 35.18,65.41 39.88,60.71 J31.2 | 36.07,71.37 36.07,75.6 | SJ8.2 44.96,61.98 | R45.2 50.8,66.93 | 50.8,66.93 v52.58,66.93 | C32.1 v41.15,65.79 | 44.96,61.98 v43.69,61.98 | 44.96,61.98 46.23,61.98 v47.5,63.25
  Bottom 0.203: J31.2 39.88,61.98 | 39.88,61.98 39.88,63.88 40.51,64.52 41.15,64.52 | 41.15,64.52 42.42,64.52 43.69,65.79 v43.69,67.06 | v43.69,61.98 39.88,61.98 | v47.5,63.25 51.31,63.25 52.58,64.52 v52.58,66.93 | v41.15,65.79 41.15,64.52
3.3V8  (via drill 0.38)
  Top 0.203: U9.1 69.27,67.39 v69.6,67.06 | J34.2 77.48,70.37 76.71,69.6 76.71,66.93 | R54.2 61.98,75.6 | 61.98,75.6 R53.2 | J33.2 61.98,71.37 | 61.98,71.37 61.59,71.37 61.09,70.87 61.09,65.41 65.79,60.71 J35.2 | 61.98,71.37 61.98,75.6 | SJ9.2 70.87,61.98 | R51.2 76.71,66.93 | 76.71,66.93 v78.49,66.93 | C36.1 v67.06,65.79 | 70.87,61.98 v69.6,61.98 | 70.87,61.98 72.14,61.98 v73.41,63.25
  Bottom 0.203: J35.2 65.79,61.98 | 65.79,61.98 65.79,63.88 66.42,64.52 67.06,64.52 | 67.06,64.52 68.33,64.52 69.6,65.79 v69.6,67.06 | v69.6,61.98 65.79,61.98 | v73.41,63.25 77.22,63.25 78.49,64.52 v78.49,66.93 | v67.06,65.79 67.06,64.52
!INT
  Top 0.203: U2.3 19.05,15.24 20.32,13.97 22.86,13.97 | J4.2 22.86,8.89 22.86,13.97 | 22.86,13.97 22.86,14.99 22.73,15.11 R3.1
!INT1
  Top 0.203: U1.3 44.96,15.24 46.23,13.97 48.77,13.97 | J8.2 48.77,8.89 48.77,13.97 | 48.77,13.97 48.77,14.99 48.64,15.11 R9.1
!INT2
  Top 0.203: U3.3 70.87,15.24 72.14,13.97 74.68,13.97 | J12.2 74.68,8.89 74.68,13.97 | 74.68,13.97 74.68,14.99 74.55,15.11 R15.1
!INT3
  Top 0.203: U4.3 19.05,41.15 20.32,39.88 22.86,39.88 | J16.2 22.86,34.8 22.86,39.88 | 22.86,39.88 22.86,40.89 22.73,41.02 R21.1
!INT4
  Top 0.203: U5.3 44.96,41.15 46.23,39.88 48.77,39.88 | J20.2 48.77,34.8 48.77,39.88 | 48.77,39.88 48.77,40.89 48.64,41.02 R27.1
!INT5
  Top 0.203: U6.3 70.87,41.15 72.14,39.88 74.68,39.88 | J24.2 74.68,34.8 74.68,39.88 | 74.68,39.88 74.68,40.89 74.55,41.02 R33.1
!INT6
  Top 0.203: U7.3 19.05,67.06 20.32,65.79 22.86,65.79 | J28.2 22.86,60.71 22.86,65.79 | 22.86,65.79 22.86,66.8 22.73,66.93 R39.1
!INT7
  Top 0.203: U8.3 44.96,67.06 46.23,65.79 48.77,65.79 | J32.2 48.77,60.71 48.77,65.79 | 48.77,65.79 48.77,66.8 48.64,66.93 R45.1
!INT8
  Top 0.203: U9.3 70.87,67.06 72.14,65.79 74.68,65.79 | J36.2 74.68,60.71 74.68,65.79 | 74.68,65.79 74.68,66.8 74.55,66.93 R51.1
!RST  (via drill 0.38)
  Top 0.203: R4.1 11.43,26.29 11.68,26.54 15.37,26.54 17.45,24.46 v17.45,21.34 U2.10
  Bottom 0.203: J4.1 27.94,8.89 27.94,15.88 22.48,21.34 v17.45,21.34
!RST1  (via drill 0.38)
  Top 0.203: R11.1 37.34,26.29 37.59,26.54 41.27,26.54 43.36,24.46 v43.36,21.34 U1.10
  Bottom 0.203: J8.1 53.85,8.89 53.85,15.88 48.39,21.34 v43.36,21.34
!RST2  (via drill 0.38)
  Top 0.203: R17.1 63.25,26.29 63.5,26.54 67.18,26.54 69.27,24.46 v69.27,21.34 U3.10
  Bottom 0.203: J12.1 79.76,8.89 79.76,15.88 74.29,21.34 v69.27,21.34
!RST3  (via drill 0.38)
  Top 0.203: R23.1 11.43,52.2 11.68,52.45 15.37,52.45 17.45,50.37 v17.45,47.24 U4.10
  Bottom 0.203: J16.1 27.94,34.8 27.94,41.78 22.48,47.24 v17.45,47.24
!RST4  (via drill 0.38)
  Top 0.203: R29.1 37.34,52.2 37.59,52.45 41.27,52.45 43.36,50.37 v43.36,47.24 U5.10
  Bottom 0.203: J20.1 53.85,34.8 53.85,41.78 48.39,47.24 v43.36,47.24
!RST5  (via drill 0.38)
  Top 0.203: R35.1 63.25,52.2 63.5,52.45 67.18,52.45 69.27,50.37 v69.27,47.24 U6.10
  Bottom 0.203: J24.1 79.76,34.8 79.76,41.78 74.29,47.24 v69.27,47.24
!RST6  (via drill 0.38)
  Top 0.203: R41.1 11.43,78.1 11.68,78.36 15.37,78.36 17.45,76.28 v17.45,73.15 U7.10
  Bottom 0.203: J28.1 27.94,60.71 27.94,67.69 22.48,73.15 v17.45,73.15
!RST7  (via drill 0.38)
  Top 0.203: R47.1 37.34,78.1 37.59,78.36 41.27,78.36 43.36,76.28 v43.36,73.15 U8.10
  Bottom 0.203: J32.1 53.85,60.71 53.85,67.69 48.39,73.15 v43.36,73.15
!RST8  (via drill 0.38)
  Top 0.203: R53.1 63.25,78.1 63.5,78.36 67.18,78.36 69.27,76.28 v69.27,73.15 U9.10
  Bottom 0.203: J36.1 79.76,60.71 79.76,67.69 74.29,73.15 v69.27,73.15
GND  (via drill 0.38)
  other vias: 15.24,20.32 12.7,15.24 21.59,19.05 24.13,16.51 18.29,22.86 25.65,16.13 20.32,22.86 30.48,13.97
  pour Top (isolate 0.305): 6.35,31.75 31.75,31.75 31.75,6.35 6.35,6.35
  pour Bottom (isolate 0.305): 31.75,31.75 6.35,31.75 6.35,6.35 31.75,6.35
GND1  (via drill 0.38)
  other vias: 41.15,20.32 38.61,15.24 47.5,19.05 50.04,16.51 44.2,22.86 51.56,16.13 46.23,22.86 56.39,13.97
  pour Top (isolate 0.305): 32.26,31.75 57.66,31.75 57.66,6.35 32.26,6.35
  pour Bottom (isolate 0.305): 57.66,31.75 32.26,31.75 32.26,6.35 57.66,6.35
GND2  (via drill 0.38)
  other vias: 67.06,20.32 64.52,15.24 73.41,19.05 75.95,16.51 70.1,22.86 77.47,16.13 72.14,22.86 82.3,13.97
  pour Top (isolate 0.305): 58.17,31.75 83.57,31.75 83.57,6.35 58.17,6.35
  pour Bottom (isolate 0.305): 83.57,31.75 58.17,31.75 58.17,6.35 83.57,6.35
GND3  (via drill 0.38)
  other vias: 15.24,46.23 12.7,41.15 21.59,44.96 24.13,42.42 18.29,48.77 25.65,42.04 20.32,48.77 30.48,39.88
  pour Top (isolate 0.305): 6.35,57.66 31.75,57.66 31.75,32.26 6.35,32.26
  pour Bottom (isolate 0.305): 31.75,57.66 6.35,57.66 6.35,32.26 31.75,32.26
GND4  (via drill 0.38)
  other vias: 41.15,46.23 38.61,41.15 47.5,44.96 50.04,42.42 44.2,48.77 51.56,42.04 46.23,48.77 56.39,39.88
  pour Top (isolate 0.305): 32.26,57.66 57.66,57.66 57.66,32.26 32.26,32.26
  pour Bottom (isolate 0.305): 57.66,57.66 32.26,57.66 32.26,32.26 57.66,32.26
GND5  (via drill 0.38)
  other vias: 67.06,46.23 64.52,41.15 73.41,44.96 75.95,42.42 70.1,48.77 77.47,42.04 72.14,48.77 82.3,39.88
  pour Top (isolate 0.305): 58.17,57.66 83.57,57.66 83.57,32.26 58.17,32.26
  pour Bottom (isolate 0.305): 83.57,57.66 58.17,57.66 58.17,32.26 83.57,32.26
GND6  (via drill 0.38)
  other vias: 15.24,72.14 12.7,67.06 21.59,70.87 24.13,68.33 18.29,74.68 25.65,67.94 20.32,74.68 30.48,65.79
  pour Top (isolate 0.305): 6.35,83.57 31.75,83.57 31.75,58.17 6.35,58.17
  pour Bottom (isolate 0.305): 31.75,83.57 6.35,83.57 6.35,58.17 31.75,58.17
GND7  (via drill 0.38)
  other vias: 41.15,72.14 38.61,67.06 47.5,70.87 50.04,68.33 44.2,74.68 51.56,67.94 46.23,74.68 56.39,65.79
  pour Top (isolate 0.305): 32.26,83.57 57.66,83.57 57.66,58.17 32.26,58.17
  pour Bottom (isolate 0.305): 57.66,83.57 32.26,83.57 32.26,58.17 57.66,58.17
GND8  (via drill 0.38)
  other vias: 67.06,72.14 64.52,67.06 73.41,70.87 75.95,68.33 70.1,74.68 77.47,67.94 72.14,74.68 82.3,65.79
  pour Top (isolate 0.305): 58.17,83.57 83.57,83.57 83.57,58.17 58.17,58.17
  pour Bottom (isolate 0.305): 83.57,83.57 58.17,83.57 58.17,58.17 83.57,58.17
N$1
  Top 0.203: SJ2.3 R1.2
N$2
  Top 0.203: R2.2 SJ2.1
N$3
  Top 0.203: SJ1.3 R5.2
N$4
  Top 0.203: C2.1 16.09,14.39 16.51,13.97 17.78,13.97 18.54,14.73 18.54,15.75 18.25,16.04 U2.2
N$5
  Top 0.203: 24.22,25.49 24.13,25.4 24.13,23.56 C1.+ 24.49,23.79 R6.1
N$6
  Top 0.203: R8.2 SJ1.1
N$7
  Top 0.203: C6.1 42,14.39 42.42,13.97 43.69,13.97 44.45,14.73 44.45,15.75 44.16,16.04 U1.2
N$8
  Top 0.203: 50.13,25.49 50.04,25.4 50.04,23.56 C5.+ 50.4,23.79 R10.1
N$9
  Top 0.203: SJ3.3 R13.2
N$10
  Top 0.203: R14.2 SJ3.1
N$11
  Top 0.203: C10.1 67.91,14.39 68.33,13.97 69.6,13.97 70.36,14.73 70.36,15.75 70.07,16.04 U3.2
N$12
  Top 0.203: 76.03,25.49 75.95,25.4 75.95,23.56 C9.+ 76.31,23.79 R16.1
N$13
  Top 0.203: SJ4.3 R19.2
N$14
  Top 0.203: R20.2 SJ4.1
N$15
  Top 0.203: C14.1 16.09,40.3 16.51,39.88 17.78,39.88 18.54,40.64 18.54,41.66 18.25,41.95 U4.2
N$16
  Top 0.203: 24.22,51.4 24.13,51.31 24.13,49.47 C13.+ 24.49,49.7 R22.1
N$17
  Top 0.203: SJ5.3 R25.2
N$18
  Top 0.203: R26.2 SJ5.1
N$19
  Top 0.203: C18.1 42,40.3 42.42,39.88 43.69,39.88 44.45,40.64 44.45,41.66 44.16,41.95 U5.2
N$20
  Top 0.203: 50.13,51.4 50.04,51.31 50.04,49.47 C17.+ 50.4,49.7 R28.1
N$21
  Top 0.203: SJ6.3 R31.2
N$22
  Top 0.203: R32.2 SJ6.1
N$23
  Top 0.203: C22.1 67.91,40.3 68.33,39.88 69.6,39.88 70.36,40.64 70.36,41.66 70.07,41.95 U6.2
N$24
  Top 0.203: 76.03,51.4 75.95,51.31 75.95,49.47 C21.+ 76.31,49.7 R34.1
N$25
  Top 0.203: SJ7.3 R37.2
N$26
  Top 0.203: R38.2 SJ7.1
N$27
  Top 0.203: C26.1 16.09,66.21 16.51,65.79 17.78,65.79 18.54,66.55 18.54,67.56 18.25,67.86 U7.2
N$28
  Top 0.203: 24.22,77.3 24.13,77.22 24.13,75.38 C25.+ 24.49,75.6 R40.1
N$29
  Top 0.203: SJ8.3 R43.2
N$30
  Top 0.203: R44.2 SJ8.1
N$31
  Top 0.203: C30.1 42,66.21 42.42,65.79 43.69,65.79 44.45,66.55 44.45,67.56 44.16,67.86 U8.2
N$32
  Top 0.203: 50.13,77.3 50.04,77.22 50.04,75.38 C29.+ 50.4,75.6 R46.1
N$33
  Top 0.203: SJ9.3 R49.2
N$34
  Top 0.203: R50.2 SJ9.1
N$35
  Top 0.203: C34.1 67.91,66.21 68.33,65.79 69.6,65.79 70.36,66.55 70.36,67.56 70.07,67.86 U9.2
N$36
  Top 0.203: 76.03,77.3 75.95,77.22 75.95,75.38 C33.+ 76.31,75.6 R52.1
PSW  (via drill 0.38)
  Top 0.203: U2.8 v19.05,20.32 19.05,25.4 17.4,27.05 9.78,27.05 8.89,26.16 R7.1
  Bottom 0.203: J4.3 21.59,8.89 22.35,9.65 25.65,9.65 27.43,11.43 27.43,15.62 22.73,20.32 v19.05,20.32
PSW1  (via drill 0.38)
  Top 0.203: U1.8 v44.96,20.32 44.96,25.4 43.31,27.05 35.69,27.05 34.8,26.16 R12.1
  Bottom 0.203: J8.3 47.5,8.89 48.26,9.65 51.56,9.65 53.34,11.43 53.34,15.62 48.64,20.32 v44.96,20.32
PSW2  (via drill 0.38)
  Top 0.203: U3.8 v70.87,20.32 70.87,25.4 69.22,27.05 61.59,27.05 60.71,26.16 R18.1
  Bottom 0.203: J12.3 73.41,8.89 74.17,9.65 77.47,9.65 79.25,11.43 79.25,15.62 74.55,20.32 v70.87,20.32
PSW3  (via drill 0.38)
  Top 0.203: U4.8 v19.05,46.23 19.05,51.31 17.4,52.96 9.78,52.96 8.89,52.07 R24.1
  Bottom 0.203: J16.3 21.59,34.8 22.35,35.56 25.65,35.56 27.43,37.34 27.43,41.53 22.73,46.23 v19.05,46.23
PSW4  (via drill 0.38)
  Top 0.203: U5.8 v44.96,46.23 44.96,51.31 43.31,52.96 35.69,52.96 34.8,52.07 R30.1
  Bottom 0.203: J20.3 47.5,34.8 48.26,35.56 51.56,35.56 53.34,37.34 53.34,41.53 48.64,46.23 v44.96,46.23
PSW5  (via drill 0.38)
  Top 0.203: U6.8 v70.87,46.23 70.87,51.31 69.22,52.96 61.59,52.96 60.71,52.07 R36.1
  Bottom 0.203: J24.3 73.41,34.8 74.17,35.56 77.47,35.56 79.25,37.34 79.25,41.53 74.55,46.23 v70.87,46.23
PSW6  (via drill 0.38)
  Top 0.203: U7.8 v19.05,72.14 19.05,77.22 17.4,78.87 9.78,78.87 8.89,77.98 R42.1
  Bottom 0.203: J28.3 21.59,60.71 22.35,61.47 25.65,61.47 27.43,63.25 27.43,67.44 22.73,72.14 v19.05,72.14
PSW7  (via drill 0.38)
  Top 0.203: U8.8 v44.96,72.14 44.96,77.22 43.31,78.87 35.69,78.87 34.8,77.98 R48.1
  Bottom 0.203: J32.3 47.5,60.71 48.26,61.47 51.56,61.47 53.34,63.25 53.34,67.44 48.64,72.14 v44.96,72.14
PSW8  (via drill 0.38)
  Top 0.203: U9.8 v70.87,72.14 70.87,77.22 69.22,78.87 61.59,78.87 60.71,77.98 R54.1
  Bottom 0.203: J36.3 73.41,60.71 74.17,61.47 77.47,61.47 79.25,63.25 79.25,67.44 74.55,72.14 v70.87,72.14
SCL  (via drill 0.38)
  Top 0.203: U2.4 19.85,15.71 v20.32,15.24 | v13.34,16.51 12.29,17.55 J1.4 | J2.4 27.71,20.55 27.94,20.32 27.94,13.97 26.67,12.7 v25.4,12.7 R1.1
  Bottom 0.203: v13.34,16.51 19.05,16.51 v20.32,15.24 20.32,12.7 | 20.32,12.7 20.32,10.16 19.05,8.89 J3.4 | v25.4,12.7 20.32,12.7
SCL1  (via drill 0.38)
  Top 0.203: U1.4 45.76,15.71 v46.23,15.24 | v39.24,16.51 38.2,17.55 J5.4 | J6.4 53.62,20.55 53.85,20.32 53.85,13.97 52.58,12.7 v51.31,12.7 R5.1
  Bottom 0.203: v39.24,16.51 44.96,16.51 v46.23,15.24 46.23,12.7 | 46.23,12.7 46.23,10.16 44.96,8.89 J7.4 | v51.31,12.7 46.23,12.7
SCL2  (via drill 0.38)
  Top 0.203: U3.4 71.67,15.71 v72.14,15.24 | v65.15,16.51 64.11,17.55 J9.4 | J10.4 79.53,20.55 79.76,20.32 79.76,13.97 78.49,12.7 v77.22,12.7 R13.1
  Bottom 0.203: v65.15,16.51 70.87,16.51 v72.14,15.24 72.14,12.7 | 72.14,12.7 72.14,10.16 70.87,8.89 J11.4 | v77.22,12.7 72.14,12.7
SCL3  (via drill 0.38)
  Top 0.203: U4.4 19.85,41.62 v20.32,41.15 | v13.34,42.42 12.29,43.46 J13.4 | J14.4 27.71,46.46 27.94,46.23 27.94,39.88 26.67,38.61 v25.4,38.61 R19.1
  Bottom 0.203: v13.34,42.42 19.05,42.42 v20.32,41.15 20.32,38.61 | 20.32,38.61 20.32,36.07 19.05,34.8 J15.4 | v25.4,38.61 20.32,38.61
SCL4  (via drill 0.38)
  Top 0.203: U5.4 45.76,41.62 v46.23,41.15 | v39.24,42.42 38.2,43.46 J17.4 | J18.4 53.62,46.46 53.85,46.23 53.85,39.88 52.58,38.61 v51.31,38.61 R25.1
  Bottom 0.203: v39.24,42.42 44.96,42.42 v46.23,41.15 46.23,38.61 | 46.23,38.61 46.23,36.07 44.96,34.8 J19.4 | v51.31,38.61 46.23,38.61
SCL5  (via drill 0.38)
  Top 0.203: U6.4 71.67,41.62 v72.14,41.15 | v65.15,42.42 64.11,43.46 J21.4 | J22.4 79.53,46.46 79.76,46.23 79.76,39.88 78.49,38.61 v77.22,38.61 R31.1
  Bottom 0.203: v65.15,42.42 70.87,42.42 v72.14,41.15 72.14,38.61 | 72.14,38.61 72.14,36.07 70.87,34.8 J23.4 | v77.22,38.61 72.14,38.61
SCL6  (via drill 0.38)
  Top 0.203: U7.4 19.85,67.53 v20.32,67.06 | v13.34,68.33 12.29,69.37 J25.4 | J26.4 27.71,72.37 27.94,72.14 27.94,65.79 26.67,64.52 v25.4,64.52 R37.1
  Bottom 0.203: v13.34,68.33 19.05,68.33 v20.32,67.06 20.32,64.52 | 20.32,64.52 20.32,61.98 19.05,60.71 J27.4 | v25.4,64.52 20.32,64.52
SCL7  (via drill 0.38)
  Top 0.203: U8.4 45.76,67.53 v46.23,67.06 | v39.24,68.33 38.2,69.37 J29.4 | J30.4 53.62,72.37 53.85,72.14 53.85,65.79 52.58,64.52 v51.31,64.52 R43.1
  Bottom 0.203: v39.24,68.33 44.96,68.33 v46.23,67.06 46.23,64.52 | 46.23,64.52 46.23,61.98 44.96,60.71 J31.4 | v51.31,64.52 46.23,64.52
SCL8  (via drill 0.38)
  Top 0.203: U9.4 71.67,67.53 v72.14,67.06 | v65.15,68.33 64.11,69.37 J33.4 | J34.4 79.53,72.37 79.76,72.14 79.76,65.79 78.49,64.52 v77.22,64.52 R49.1
  Bottom 0.203: v65.15,68.33 70.87,68.33 v72.14,67.06 72.14,64.52 | 72.14,64.52 72.14,61.98 70.87,60.71 J35.4 | v77.22,64.52 72.14,64.52
SDA
  Top 0.203: J3.3 16.51,8.89 15.24,10.16 13.97,10.16 12.7,11.43 12.7,12.7 | 12.7,12.7 12.7,13.97 10.16,16.51 10.16,18.16 10.55,18.55 J1.3 13.2,18.55 13.97,17.78 21.34,17.78 | R2.1 12.7,12.7 | U2.5 20.65,16.05 20.83,15.88 21.08,15.88 21.34,16.13 21.34,17.78 | J2.3 25.27,19.55 23.49,17.78 21.34,17.78
SDA1
  Top 0.203: J7.3 42.42,8.89 41.15,10.16 39.88,10.16 38.61,11.43 38.61,12.7 | 38.61,12.7 38.61,13.97 36.07,16.51 36.07,18.16 36.46,18.55 J5.3 39.11,18.55 39.88,17.78 47.24,17.78 | R8.1 38.61,12.7 | U1.5 46.56,16.05 46.74,15.88 46.99,15.88 47.24,16.13 47.24,17.78 | J6.3 51.17,19.55 49.4,17.78 47.24,17.78
SDA2
  Top 0.203: J11.3 68.33,8.89 67.06,10.16 65.79,10.16 64.52,11.43 64.52,12.7 | 64.52,12.7 64.52,13.97 61.98,16.51 61.98,18.16 62.37,18.55 J9.3 65.02,18.55 65.79,17.78 73.15,17.78 | R14.1 64.52,12.7 | U3.5 72.47,16.05 72.64,15.88 72.9,15.88 73.15,16.13 73.15,17.78 | J10.3 77.08,19.55 75.31,17.78 73.15,17.78
SDA3
  Top 0.203: J15.3 16.51,34.8 15.24,36.07 13.97,36.07 12.7,37.34 12.7,38.61 | 12.7,38.61 12.7,39.88 10.16,42.42 10.16,44.07 10.55,44.46 J13.3 13.2,44.46 13.97,43.69 21.34,43.69 | R20.1 12.7,38.61 | U4.5 20.65,41.96 20.83,41.78 21.08,41.78 21.34,42.04 21.34,43.69 | J14.3 25.27,45.46 23.49,43.69 21.34,43.69
SDA4
  Top 0.203: J19.3 42.42,34.8 41.15,36.07 39.88,36.07 38.61,37.34 38.61,38.61 | 38.61,38.61 38.61,39.88 36.07,42.42 36.07,44.07 36.46,44.46 J17.3 39.11,44.46 39.88,43.69 47.24,43.69 | R26.1 38.61,38.61 | U5.5 46.56,41.96 46.74,41.78 46.99,41.78 47.24,42.04 47.24,43.69 | J18.3 51.17,45.46 49.4,43.69 47.24,43.69
SDA5
  Top 0.203: J23.3 68.33,34.8 67.06,36.07 65.79,36.07 64.52,37.34 64.52,38.61 | 64.52,38.61 64.52,39.88 61.98,42.42 61.98,44.07 62.37,44.46 J21.3 65.02,44.46 65.79,43.69 73.15,43.69 | R32.1 64.52,38.61 | U6.5 72.47,41.96 72.64,41.78 72.9,41.78 73.15,42.04 73.15,43.69 | J22.3 77.08,45.46 75.31,43.69 73.15,43.69
SDA6
  Top 0.203: J27.3 16.51,60.71 15.24,61.98 13.97,61.98 12.7,63.25 12.7,64.52 | 12.7,64.52 12.7,65.79 10.16,68.33 10.16,69.98 10.55,70.37 J25.3 13.2,70.37 13.97,69.6 21.34,69.6 | R38.1 12.7,64.52 | U7.5 20.65,67.87 20.83,67.69 21.08,67.69 21.34,67.94 21.34,69.6 | J26.3 25.27,71.37 23.49,69.6 21.34,69.6
SDA7
  Top 0.203: J31.3 42.42,60.71 41.15,61.98 39.88,61.98 38.61,63.25 38.61,64.52 | 38.61,64.52 38.61,65.79 36.07,68.33 36.07,69.98 36.46,70.37 J29.3 39.11,70.37 39.88,69.6 47.24,69.6 | R44.1 38.61,64.52 | U8.5 46.56,67.87 46.74,67.69 46.99,67.69 47.24,67.94 47.24,69.6 | J30.3 51.17,71.37 49.4,69.6 47.24,69.6
SDA8
  Top 0.203: J35.3 68.33,60.71 67.06,61.98 65.79,61.98 64.52,63.25 64.52,64.52 | 64.52,64.52 64.52,65.79 61.98,68.33 61.98,69.98 62.37,70.37 J33.3 65.02,70.37 65.79,69.6 73.15,69.6 | R50.1 64.52,64.52 | U9.5 72.47,67.87 72.64,67.69 72.9,67.69 73.15,67.94 73.15,69.6 | J34.3 77.08,71.37 75.31,69.6 73.15,69.6
VBACKUP
  Top 0.203: U2.7 19.85,19.85 20.32,20.32 22.86,20.32 | C3.1 22.86,20.32 | 22.86,20.32 22.86,26.29 23.24,26.67 26.42,26.67 26.67,26.42 R6.2
VBACKUP1
  Top 0.203: U1.7 45.76,19.85 46.23,20.32 48.77,20.32 | C7.1 48.77,20.32 | 48.77,20.32 48.77,26.29 49.15,26.67 52.32,26.67 52.58,26.42 R10.2
VBACKUP2
  Top 0.203: U3.7 71.67,19.85 72.14,20.32 74.68,20.32 | C11.1 74.68,20.32 | 74.68,20.32 74.68,26.29 75.06,26.67 78.23,26.67 78.49,26.42 R16.2
VBACKUP3
  Top 0.203: U4.7 19.85,45.76 20.32,46.23 22.86,46.23 | C15.1 22.86,46.23 | 22.86,46.23 22.86,52.2 23.24,52.58 26.42,52.58 26.67,52.32 R22.2
VBACKUP4
  Top 0.203: U5.7 45.76,45.76 46.23,46.23 48.77,46.23 | C19.1 48.77,46.23 | 48.77,46.23 48.77,52.2 49.15,52.58 52.32,52.58 52.58,52.32 R28.2
VBACKUP5
  Top 0.203: U6.7 71.67,45.76 72.14,46.23 74.68,46.23 | C23.1 74.68,46.23 | 74.68,46.23 74.68,52.2 75.06,52.58 78.23,52.58 78.49,52.32 R34.2
VBACKUP6
  Top 0.203: U7.7 19.85,71.67 20.32,72.14 22.86,72.14 | C27.1 22.86,72.14 | 22.86,72.14 22.86,78.1 23.24,78.49 26.42,78.49 26.67,78.23 R40.2
VBACKUP7
  Top 0.203: U8.7 45.76,71.67 46.23,72.14 48.77,72.14 | C31.1 48.77,72.14 | 48.77,72.14 48.77,78.1 49.15,78.49 52.32,78.49 52.58,78.23 R46.2
VBACKUP8
  Top 0.203: U9.7 71.67,71.67 72.14,72.14 74.68,72.14 | C35.1 74.68,72.14 | 74.68,72.14 74.68,78.1 75.06,78.49 78.23,78.49 78.49,78.23 R52.2

## Text on the board
Bottom: X01 | X01 | X01 | X01 | X01 | X01 | X01 | X01 | X01
Dimension: v-score | v-score | v-score | v-score
tPlace: Qwiic RTC Module | Qwiic RTC Module | Qwiic RTC Module | I2C | I2C | I2C | GND | 3.3V | SDA | SCL | PSW | !INT | !RST | GND | 3.3V | SDA | SCL | PSW | !INT | !RST | GND | 3.3V | SDA | SCL | PSW | !INT | !RST | Qwiic RTC Module | Qwiic RTC Module | Qwiic RTC Module | I2C | I2C | I2C | GND | 3.3V | SDA | SCL | PSW | !INT | !RST | GND | 3.3V | SDA | SCL | PSW | !INT | !RST | GND | 3.3V | SDA | SCL | PSW | !INT | !RST | Qwiic RTC Module | Qwiic RTC Module | Qwiic RTC Module | I2C | I2C | I2C | GND | 3.3V | SDA | SCL | PSW | !INT | !RST | GND | 3.3V | SDA | SCL | PSW | !INT | !RST | GND | 3.3V | SDA | SCL | PSW | !INT | !RST
bPlace: Qwiic RTC Module | Qwiic RTC Module | Qwiic RTC Module | GND | 3.3V | SDA | SCL | PSW | !INT | !RST | GND | 3.3V | SDA | SCL | PSW | !INT | !RST | GND | 3.3V | SDA | SCL | PSW | !INT | !RST | Qwiic RTC Module | Qwiic RTC Module | Qwiic RTC Module | GND | 3.3V | SDA | SCL | PSW | !INT | !RST | GND | 3.3V | SDA | SCL | PSW | !INT | !RST | GND | 3.3V | SDA | SCL | PSW | !INT | !RST | Qwiic RTC Module | Qwiic RTC Module | Qwiic RTC Module | GND | 3.3V | SDA | SCL | PSW | !INT | !RST | GND | 3.3V | SDA | SCL | PSW | !INT | !RST | GND | 3.3V | SDA | SCL | PSW | !INT | !RST